# Altium PCB PCB1.PcbDoc
Units mil, origin at the board's own origin, x right, y up, seen from the top; angles counter-clockwise.
Board outline 1585 x 395 mil, 2 copper layers (Top Layer, Bottom Layer); 27 components, 17 nets, 84 pads, 16 vias.
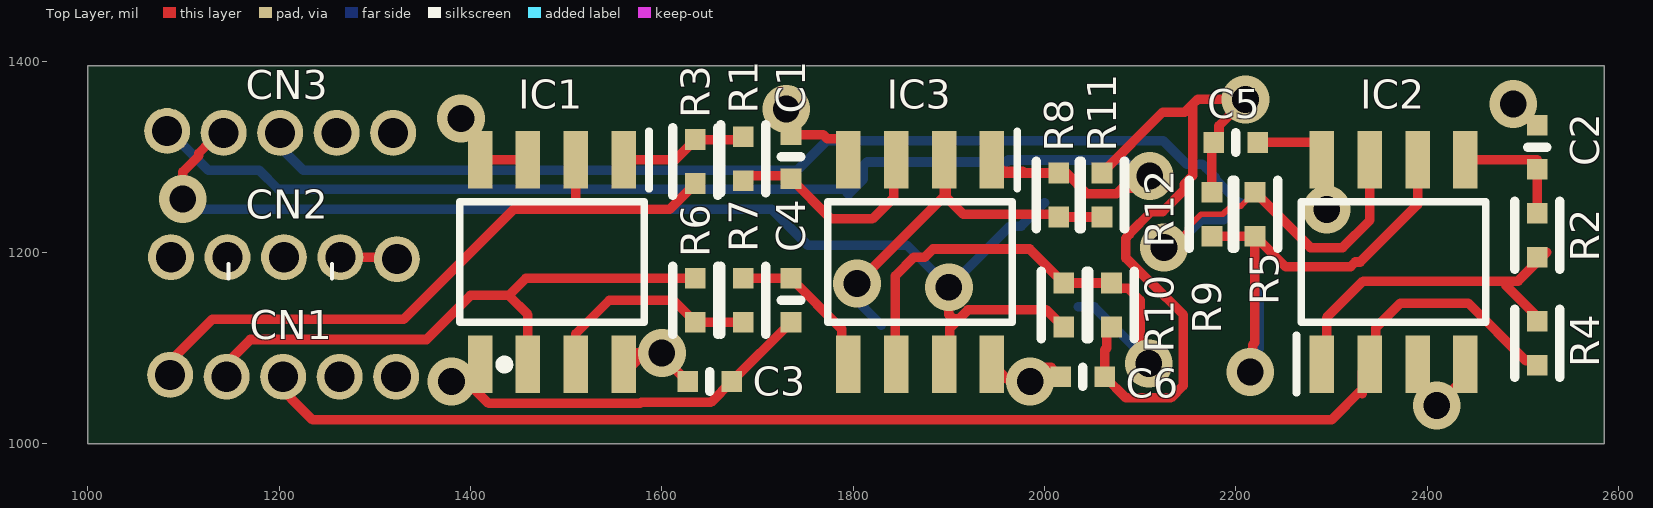
[diagram p0: Top Layer view]
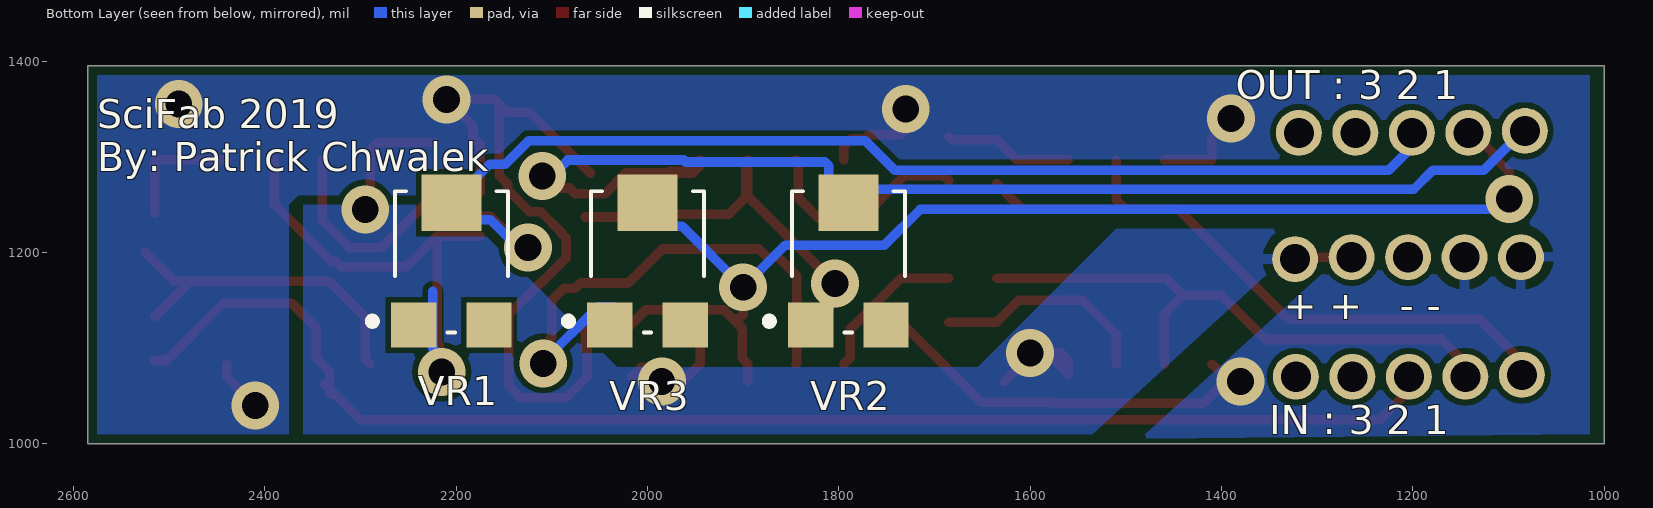
[diagram p1: Bottom Layer view, seen from below]
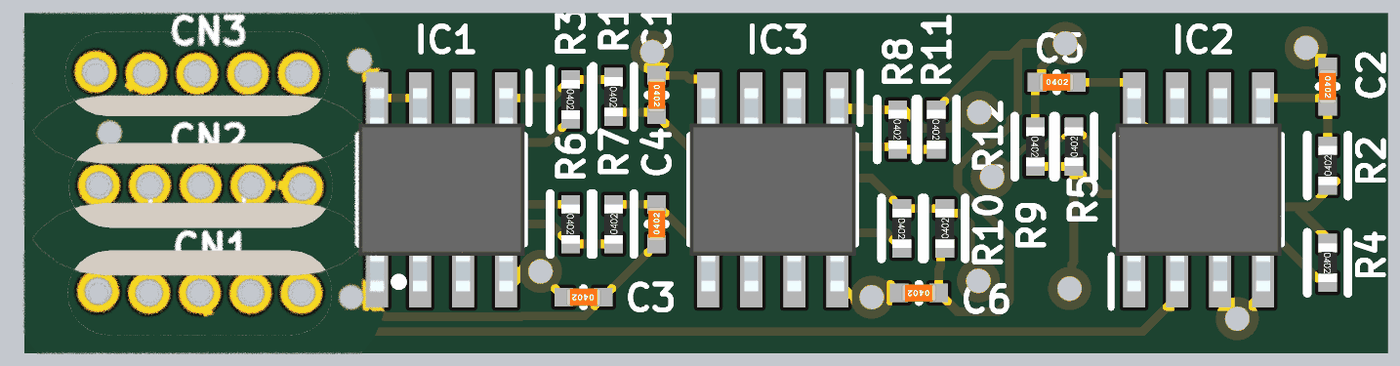
[diagram p2: 3D render of the assembled board from above, using the file's embedded part models]
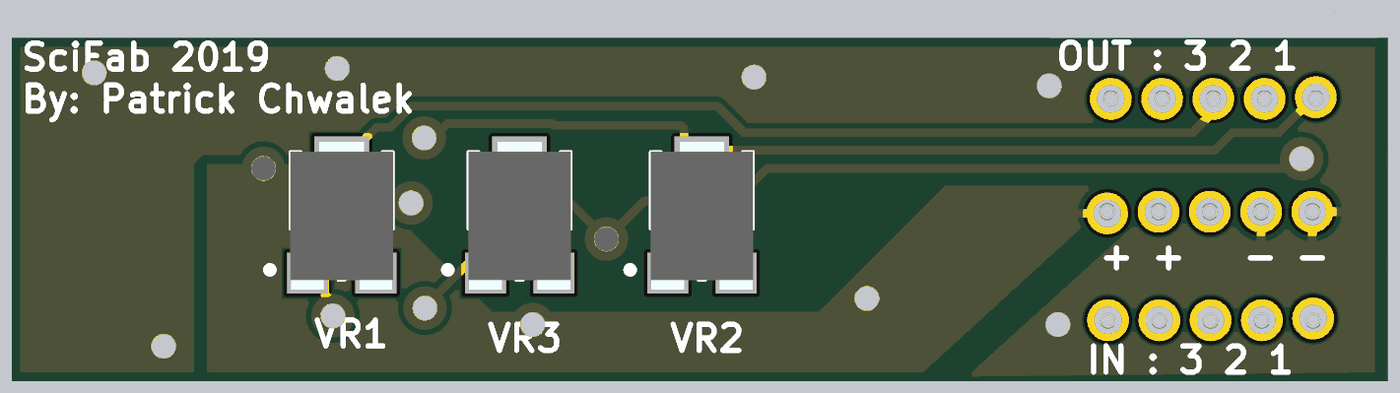
[diagram p3: 3D render of the assembled board from below, using the file's embedded part models]

## Layer stack, top to bottom
Top Solder: solder mask 0.4, Solder Resist, Dk 3.5
Top Layer: signal copper 1.4
Dielectric 1: dielectric 12.6, FR-4, Dk 4.8
Bottom Layer: signal copper 1.4
Bottom Solder: solder mask 0.4, Solder Resist, Dk 3.5

## Board outline
1000,1000 2585,1000 2585,1395 1000,1395

## Design rules (kind name [scope] priority, off if disabled: settings)
Clearance [All] p1: gap=6 ignorepadtopadclearanceinfootprint=FALSE except(0: Arc-Hole Track-Hole SMDPad-Hole THPad-Hole Via-Hole Fill-Hole Poly-Hole Region-Hole Text-Hole)
PlaneConnect [All] p1: planeconnectstyle=Direct reliefexpansion=20 reliefentries=4 reliefconductorwidth=10 reliefairgap=10
PolygonConnect [All] p1: connectstyle=Relief reliefconductorwidth=10 reliefentries=4 polygonreliefangle="90 Angle" airgapwidth=10
RoutingVias [All] p1: holewidth=28 width=50 viastyle="Through Hole" minholewidth=28 minwidth=50 maxholewidth=28 maxwidth=50
SolderMaskExpansion [All] p1: expansion=4
Width [All] p1: maxlimit=10 minlimit=6 preferedwidth=6 minimp=50.000000 maximp=50.000000 favimp=50.000000
29 further rules are at their usual default settings.

## Components (designator, comment, footprint, x,y, rotation, side; value= is the part's Value field where it differs from the comment)
C1 "47nF" SMD-0402C 1735,1300 r180 top
C2 "47nF" SMD-0402C 2515,1310 r180 top
C3 "0.10µF" SMD-0402C 1650,1065 r90 top
C4 "47nF" SMD-0402C 1735,1150 r0 top
C5 "0.10µF" SMD-0402C 2200,1315 r270 top
C6 "0.10µF" SMD-0402C 2040,1070 r90 top
CN1 "XNT-005MF-05A" XNT-005MF-05A 1204.06,1070 r0 top
CN2 "XNT-005MF-05A" XNT-005MF-05A 1205,1195 r180 top
CN3 "XNT-005MF-05A" XNT-005MF-05A 1200.94,1325 r0 top
IC1 "TLV2462CDR" SOIC127P600X175-8N 1485,1190 r270 top
IC2 "TLV2462CDR" SOIC127P600X175-8N 2365,1190 r90 top
IC3 "TLV2462CDR" SOIC127P600X175-8N 1870,1190 r270 top
R1 "240k" SMD-0402-RES 1685,1298 r180 top
R2 "240k" SMD-0402-RES 2515,1218 r0 top
R3 "470k" SMD-0402-RES 1635,1295 r180 top
R4 "470k" SMD-0402-RES 2515,1105 r180 top
R5 "470k" SMD-0402-RES 2220,1240 r0 top
R6 "470k" SMD-0402-RES 1635,1150 r180 top
R7 "240k" SMD-0402-RES 1685,1150 r0 top
R8 "470k" SMD-0402-RES 2015,1260 r180 top
R9 "470k" SMD-0402-RES 2070,1145 r0 top
R10 "470k" SMD-0402-RES 2020,1145 r180 top
R11 "470k" SMD-0402-RES 2060,1260 r180 top
R12 "470k" SMD-0402-RES 2175,1240 r180 top
VR1 "TC33X-2-304E" TC33X2304E 2205,1195 r180 bottom
VR2 "TC33X-2-304E" TC33X2304E 1790,1195 r180 bottom
VR3 "TC33X-2-304E" TC33X2304E 2000,1195 r180 bottom

## Footprints (in the part's own frame and the unit in brackets; to place one, negate y for a bottom-side part, rotate by r counter-clockwise, add the part's x,y. Pads: shape width x height; smd on the part's side, far side on the other; paste and mask are expansions set on the pad)
SMD-0402-RES [mm]
  rect 0.55x0.55 smd: 1(0,0.584) 2(0,-0.584)
  silkscreen extent -0.6,-0.9 0.6,0.9, body extent -0.28,-0.57 0.27,0.58, height 0.41
SMD-0402C [mm]
  rect 0.55x0.55 smd: 1(0,0.584) 2(0,-0.584)
  silkscreen extent -0.25,0 0.25,0, body extent -0.25,-0.51 0.25,0.51, height 0.51
SOIC127P600X175-8N [mm]
  rect 1.525x0.65 smd: 1(-2.712,1.905) 2(-2.712,0.635) 3(-2.712,-0.635) 4(-2.712,-1.905) 5(2.712,-1.905) 6(2.712,-0.635) 7(2.712,0.635) 8(2.712,1.905)
  silkscreen extent -3.47,-2.45 1.6,2.58, body extent -3,-2.45 3,2.45, height 1.75
TC33X2304E [mm]
  rect 1.2x1.2 smd: 1(-1,-1.8) 3(1,-1.8)
  rect 1.6x1.5 smd: 2(0,1.45)
  silkscreen extent -2.2,-2 1.5,1.75, body extent -1.5,-2.28 1.5,2.05, height 1.3
XNT-005MF-05A [mil]
  round 48 hole 31.5: 1(-118.11,1.97) 2(-59.06,0) 3(0,0) 4(59.06,0) 5(118.11,0)
  silkscreen extent -57,102 51,118, body extent -217,-104 217,104, height 144

## Part data
C1 C2 C4: library part GJM1555C1H5R0BB01D, "CAP CER 5PF 50V NP0 0402", Digi-Key Part Number=490-8103-1-ND, Manufacturer="Murata Electronics North America", Operating Temperature="-55°C ~ 125°C", Package / Case="0402 (1005 Metric)", Ratings=-, Temperature Coefficient="C0G, NP0", Tolerance=±0.1pF, Voltage=50V, @ qty=0, Applications="RF, Microwave, High Frequency", Datasheets=http://www.murata.com/~/media/webrenewal/support/library/catalog/products/capacitor/mlcc/c02e.pdf, Factory Stock=0, Features="High Q, Low Loss", Height - Seated (Max)=-, Image=//media.digikey.com/Renders/Murata%20Renders/ZRB-SERIES-0402.jpg, Lead Spacing=-, Lead Style=-, Minimum Quantity=1, Mounting Type="Surface Mount, MLCC", Packaging="Cut Tape (CT)", Part Number=GJM1555C1H5R0BB01D, Part Status=Active, Quantity Available=17055, Series=GJM, Size / Dimension="0.039\" L x 0.020\" W (1.00mm x 0.50mm)", Thickness (Max)="0.022\" (0.55mm)", Unit Price (USD)=0.2
C3 C5 C6: library part GCM155R71C104KA55D, "CAP CER 0.1UF 16V X7R 0402", Digi-Key Part Number=490-4759-1-ND, Manufacturer="Murata Electronics North America", Operating Temperature="-55°C ~ 125°C", Package / Case="0402 (1005 Metric)", Ratings=AEC-Q200, Temperature Coefficient=X7R, Tolerance=±10%, Voltage=16V, @ qty=0, Applications=Automotive, Datasheets=http://www.murata.com/~/media/webrenewal/support/library/catalog/products/capacitor/mlcc/c03e.ashx, Factory Stock=0, Features=-, Height - Seated (Max)=-, Image=//media.digikey.com/Renders/Murata%20Renders/ZRB-SERIES-0402.jpg, Lead Spacing=-, Lead Style=-, Minimum Quantity=1, Mounting Type="Surface Mount, MLCC", Packaging="Cut Tape (CT)", Part Number=GCM155R71C104KA55D, Part Status=Active, Quantity Available=734194, Series=GCM, Size / Dimension="0.039\" L x 0.020\" W (1.00mm x 0.50mm)", Thickness (Max)="0.022\" (0.55mm)", Unit Price (USD)=0.1
IC1 IC2 IC3: "Integrated Circuit", Manufacturer_Name="Texas Instruments", Mouser Part Number=595-TLV2462CDR, RS Part Number=6610379, Datasheet Link=http://www.ti.com/lit/gpn/tlv2462, Manufacturer_Part_Number=TLV2462CDR, Mouser Price/Stock=https://www.mouser.com/Search/Refine.aspx?Keyword=595-TLV2462CDR, RS Price/Stock=https://uk.rs-online.com/web/p/products/6610379
R1 R2 R3 R4 R5 R6 R7 R8 R9 R10 R11 R12: library part ERJ-2GEJ104X, "RES SMD 470K OHM 5% 1/10W 0402", Digi-Key Part Number=P100KJCT-ND, Manufacturer="Panasonic Electronic Components", Operating Temperature="-55°C ~ 155°C", Package / Case="0402 (1005 Metric)", Power (Watts)="0.1W, 1/10W", Supplier Device Package=0402, Temperature Coefficient=±200ppm/°C, Tolerance=±5%, @ qty=1500, Composition="Thick Film", Datasheets=http://industrial.panasonic.com/www-cgi/jvcr13pz.cgi?E+PZ+3+AOA0001+ERJ2GEJ104X+7+WW, Factory Stock=0, Failure Rate=-, Features="Automotive AEC-Q200", Height - Seated (Max)="0.016\" (0.40mm)", Image=//media.digikey.com/Photos/Panasonic%20Photos/ERJ-PA2-Series.jpg, Minimum Quantity=1, Number of Terminations=2, Packaging="Cut Tape (CT)", Part Number=ERJ-2GEJ104X, Part Status=Active, Quantity Available=2387986, Series=ERJ, Size / Dimension="0.039\" L x 0.020\" W (1.00mm x 0.50mm)", Unit Price (USD)=0.00350
VR1 VR2 VR3: "Variable Resistor", Manufacturer_Name=Bourns, Mouser Part Number=652-TC33X-2-304E, Datasheet Link=https://componentsearchengine.com/Datasheets/1/TC33X-2-304E.pdf, Height=1.2mm, Manufacturer_Part_Number=TC33X-2-304E, Mouser Price/Stock=https://www.mouser.com/Search/Refine.aspx?Keyword=652-TC33X-2-304E

## Via types
v1: diameter 50, hole 28, Top Layer to Bottom Layer, tented both sides, 16 vias

## Nets (pads, with @x,y where several pads share a name; then routed paths per layer and width w, separated by ;. In a path a pad name is that pad's centre, name@x,y a point inside that pad or via, vN(x,y) a via of type N, cw(c..) or ccw(c..) an arc to the next point about the centre after c; other vN are vias at no path point)
3.3V: C3.1 C5.1 C6.1 CN2.1 CN2.2 IC1.8 IC2.8 IC3.8 | length 466.3
  Top Layer w10: CN2.2 1321.14,1195 CN2.1 ; v1(1600,1095) v1@1598.5,1093.5 ; C3.1 v1@1598.5,1093.5 ; IC3.8@1945,1105 IC3.8 1960.23,1068 1982,1068 v1(1985,1065) 1990,1070 C6.1 2007,1080 v1@2000,1080 ; C5.1 2282.2,1315 2290,1307.2 IC2.8 2290,1250 v1(2295,1245) ; v1@1596.1,1093.7 1597.4,1092.4 v1@1598.5,1093.5 ; v1@1596.1,1093.7 1594.8,1095 1567.8,1095 1560,1087.2 IC1.8 1560,1072.8 1580.9,1093.7 v1@1596.1,1093.7 ; v1@1596.1,1093.7 1598.3,1093.7 v1@1598.5,1093.5
DIODE_1_AMP_OUT: CN3.1 IC3.1 R8.2 VR2.2 | length 1314.7
  Top Layer w10: 1977,1285 1956.77,1285 1947.99,1293.78 IC3.1 1945,1290.8 1952.8,1283 1977,1283 R8.2 2022.79,1283 2044.62,1261.17 2075.38,1261.17 2081.56,1267.35 2101.52,1267.35 2110,1275.83 v1(2110,1280)
  Bottom Layer w10: CN3.1 1084.77,1326.97 1125.74,1286 1179,1286 1199,1266 1790.23,1266 1795.19,1261.04 1810.76,1276.61 1810.76,1290.76 1814.53,1294.53 1960.2,1294.53 1962.29,1296.61 2083.32,1296.61 2099.93,1280 v1(2110,1280)
DIODE_2_AMP_OUT: CN3.2 IC3.7 R10.1 VR3.2 | length 1352.8
  Top Layer w10: v1(1099.2,1255.97) 1099.2,1284.2 1115,1300 1115.87,1300.87 1115.87,1303.7 1126.89,1314.72 CN3.2@1126.89,1325 ; IC3.7@1895,1066 IC3.7 1901.13,1089.36 1901.13,1121.13 1910.56,1130.56 ; v1(1900,1163.54) 1900,1135 1904.44,1130.56 1910.56,1130.56 ; R10.1 2002,1140 1920,1140 1910.56,1130.56
  Bottom Layer w10: v1@1091.46,1243.54 1107.91,1260 1103.88,1255.97 v1(1099.2,1255.97) 1089.86,1255.97 1085.82,1260 1100.82,1245 1714.85,1245 1752.29,1207.56 1855.98,1207.56 v1(1900,1163.54) 1964.02,1227.56 1975.47,1227.56 VR3.2
DIODE_3_AMP_OUT: CN3.3 IC2.7 R5.1 VR1.2 | length 1513.8
  Top Layer w6: 2149.17,1219.17 2149.17,1225.55 2163.62,1240 2186.38,1240 2194.83,1248.45 2205.45,1248.45 R5.1
  Top Layer w10: v1@2133.07,1203.07 2149.17,1219.17 ; R5.1 2278,1205 2311.57,1205 2340,1233.43 IC2.7
  Bottom Layer w10: CN3.3@1189.85,1325 1185.94,1325 1224.94,1286 1741.68,1286 1772.29,1316.61 2124.3,1316.61 2148.57,1292.35 2164.74,1292.35 2168.6,1288.48 2178.5,1278.58 2178.5,1276.61 2203.03,1252.09 VR1.2 2187.28,1234.36 2164.36,1234.36 2135,1205 v1(2125,1205)
DIODE_IN_1: CN1.1 IC1.2 R3.1 | length 701.9
  Top Layer w10: CN1.1@1071.89,1071.97 1129.92,1130 1330,1130 1445,1245 1500,1245 ; IC1.2 1510,1255 1500,1245 ; R3.1 1608,1245 1500,1245
DIODE_IN_2: CN1.2 IC1.6 R6.2 | length 626.8
  Top Layer w10: CN1.2@1130.94,1070 1169.94,1109 1354,1109 1400,1155 1440,1155 ; IC1.6 1460,1135 1440,1155 ; R6.2 1458,1173 1440,1155
DIODE_IN_3: CN1.3 IC2.2 R4.1 | length 1460.4
  Top Layer w10: CN1.3@1190,1070 1235,1025 2300,1025 IC2.2@2332.2,1057.2 ; 2332.2,1052.2 IC2.2@2332.2,1057.2 ; IC2.2@2337.2,1062.2 IC2.2@2332.2,1057.2 ; R4.1@2515,1087 2503,1087 2443,1147 2372,1147 2346.13,1121.13 2346.13,1089.36 IC2.2 2332.2,1075.43 2332.2,1062.2 IC2.2@2332.2,1057.2
GND: C1.2 C2.2 C3.2 C4.2 C5.2 C6.2 CN2.4 CN2.5 IC1.3 IC1.4 IC1.5 IC2.3 IC2.4 IC3.4 R9.2 R11.2 R12.2 | length 1513.8
  Top Layer w10: v1(1380,1065) 1391.77,1065 IC1.5 ; v1(1390,1340) 1410,1320 IC1.4 IC1.3 ; IC1.5@1403.84,1057.27 1418.89,1042.21 1577.35,1042.21 1578.32,1043.17 1651.17,1043.17 C3.2 C4.2 ; v1(1730,1350) 1730,1328 C1.2 1768.77,1323 1773.06,1318.71 1787.2,1318.71 1795,1310.91 IC3.4 ; R11.2 2123.5,1346.5 2146.5,1346.5 2155,1355 ; R9.2 2065,1117 2065,1100 2063,1098 C6.2 2084.99,1048.01 2132.15,1048.01 2145,1060.86 2145,1069.09 2145.01,1134.99 2111,1169 2110.09,1169 2085,1194.09 2085,1215 2089,1219 2089,1219.91 2111.59,1242.5 2123.41,1242.5 2146,1265.09 2146,1271.21 2155,1280.21 2155,1355 ; R12.2 2175,1313 C5.2 2182.43,1320.43 2182.43,1332.43 v1(2210,1360) 2160,1360 2155,1355 ; v1(2410,1040) 2440,1070 IC2.4 ; v1(2490,1355) C2.2@2507,1338
  Bottom Layer w10: v1@1720,1340 v1(1730,1350)
HP_FILTER_OUT_1: C1.1 IC3.3 R1.1 | length 227.8
  Top Layer w10: R1.1 1690,1280 1732,1280 C1.1 1777,1235 1820,1235 1842.61,1257.61 1842.61,1294.38 IC3.3
HP_FILTER_OUT_2: C4.1 IC3.5 R7.1 | length 164.6
  Top Layer w10: R7.1 C4.1 1787.87,1120.13 1787.87,1090.36 IC3.5
HP_FILTER_OUT_3: C2.1 IC2.5 R2.1 | length 130.8
  Top Layer w10: IC2.5 2515,1296.77 C2.1 R2.1
NetIC1_1: IC1.1 R1.2 R3.2 | length 135
  Top Layer w10: IC1.1 1613.77,1296.77 R3.2 1682,1318 R1.2
NetIC1_7: IC1.7 R6.1 R7.2 | length 230.8
  Top Layer w10: IC1.7 1510,1115 1545,1150 1612,1150 R6.1 R7.2
NetIC2_1: IC2.1 R2.2 R4.2 | length 363.7
  Top Layer w10: IC2.1 2295,1088.23 2295,1131.86 2333.14,1170 2488,1170 ; R4.2@2515,1133 2481.5,1166.5 2488,1170 ; R2.2@2525,1200 2495,1170 2488,1170
NetIC2_6: IC2.6 R5.2 R12.1 VR1.1 | length 545.2
  Top Layer w10: R12.1 R5.2 ; v1(2215,1075) 2217.65,1077.65 2217.65,1103.51 2220,1105.86 R5.2 ; IC2.6 2390,1250 2330,1190 2324.85,1190 2319.85,1185 2252,1185 R5.2
  Bottom Layer w10: v1(2215,1075) 2210,1075 2205,1080 2224.37,1099.37 2224.37,1159.13
NetIC3_2: IC3.2 R8.1 R11.1 VR2.1 | length 429.6
  Top Layer w10: v1(1803.95,1167.56) 1895,1258.61 IC3.2 1897.39,1294.38 1897.39,1257.61 1915,1240 2012,1240 R8.1 R11.1 R11.1@2065,1237
  Bottom Layer w10: v1@1796.61,1156.9 VR2.1
NetIC3_6: IC3.6 R9.1 R10.2 VR3.1 | length 551.6
  Top Layer w10: IC3.6 1843.95,1084.28 1843.95,1175.51 1863.43,1195 1874.89,1195 1883.43,1203.54 1984.46,1203.54 R10.2 R9.1 2075.43,1162.57 2087.43,1162.57 2100,1150 2100,1110.86 2102.35,1108.51 2102.35,1090.68 v1(2109.01,1084.01)
  Bottom Layer w10: VR3.1@2035.35,1143.15 2051.85,1143.15 2109.01,1085.99 v1(2109.01,1084.01)
pads on no net: CN1.4 CN1.5 CN2.3 CN3.4 CN3.5 VR1.3 VR2.3 VR3.3

## Polygon pours and split planes (outlines as drawn)
no net on Top Layer (solid, pour order 12): 1210,1740
no net on Top Layer (solid, pour order 0): 1010,1010
GND on Bottom Layer (solid, remove dead copper, pour order 10): 1485,1005 1015,1010 1015,1385 2575,1385 2575,1010 2375,1010 2375,1250 2365,1260 2185,1260 2025,1100 1660,1100 1515,1245 1220,1245
3.3V on Bottom Layer (solid, remove dead copper, pour order 6): 1300,1225 1510,1225 1655,1080 2031.63,1080 2201.63,1250 2360,1250 2360,1010 1535,1010
no net on Bottom Layer (solid, pour order 4): 1005,1005

## Silkscreen, mask and mechanical layers (free items; w line width, h text height)
Bottom Overlay:
  text "OUT : 3 2 1" at 1385,1360 h30
  text "SciFab 2019 / By: Patrick Chwalek" at 2575,1285 h30
  text "+ +   - -" at 1335,1130 h30
  text "IN : 3 2 1" at 1350,1010 h30
Mechanical BO:
  the board outline again, w0.5